# Altium PCB Mad17(grr).PcbDoc (part 1 of 3)
Units mil, origin at the board's own origin, x right, y up, seen from the top; angles counter-clockwise.
Board outline 5600 x 3900 mil, 2 copper layers (Top Layer, Bottom Layer); 72 components, 51 nets, 251 pads, 49 vias.
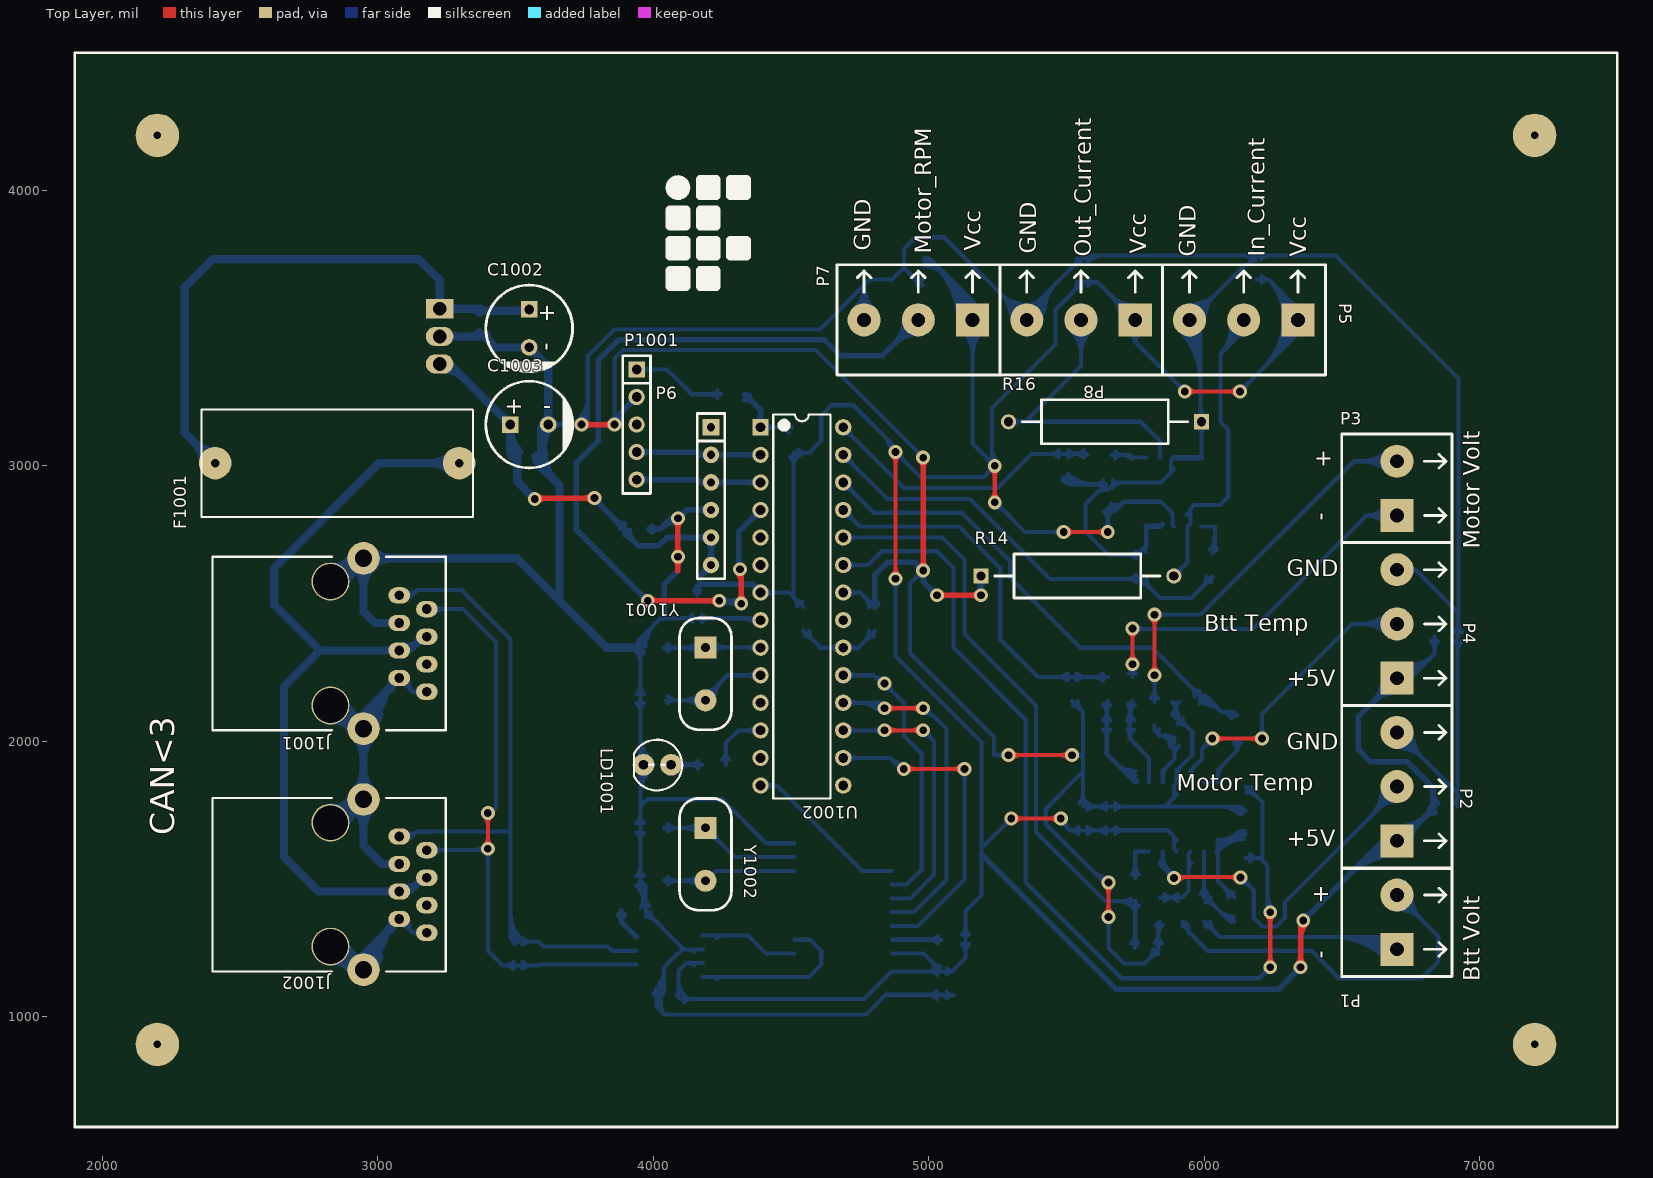
[diagram p0: Top Layer view]
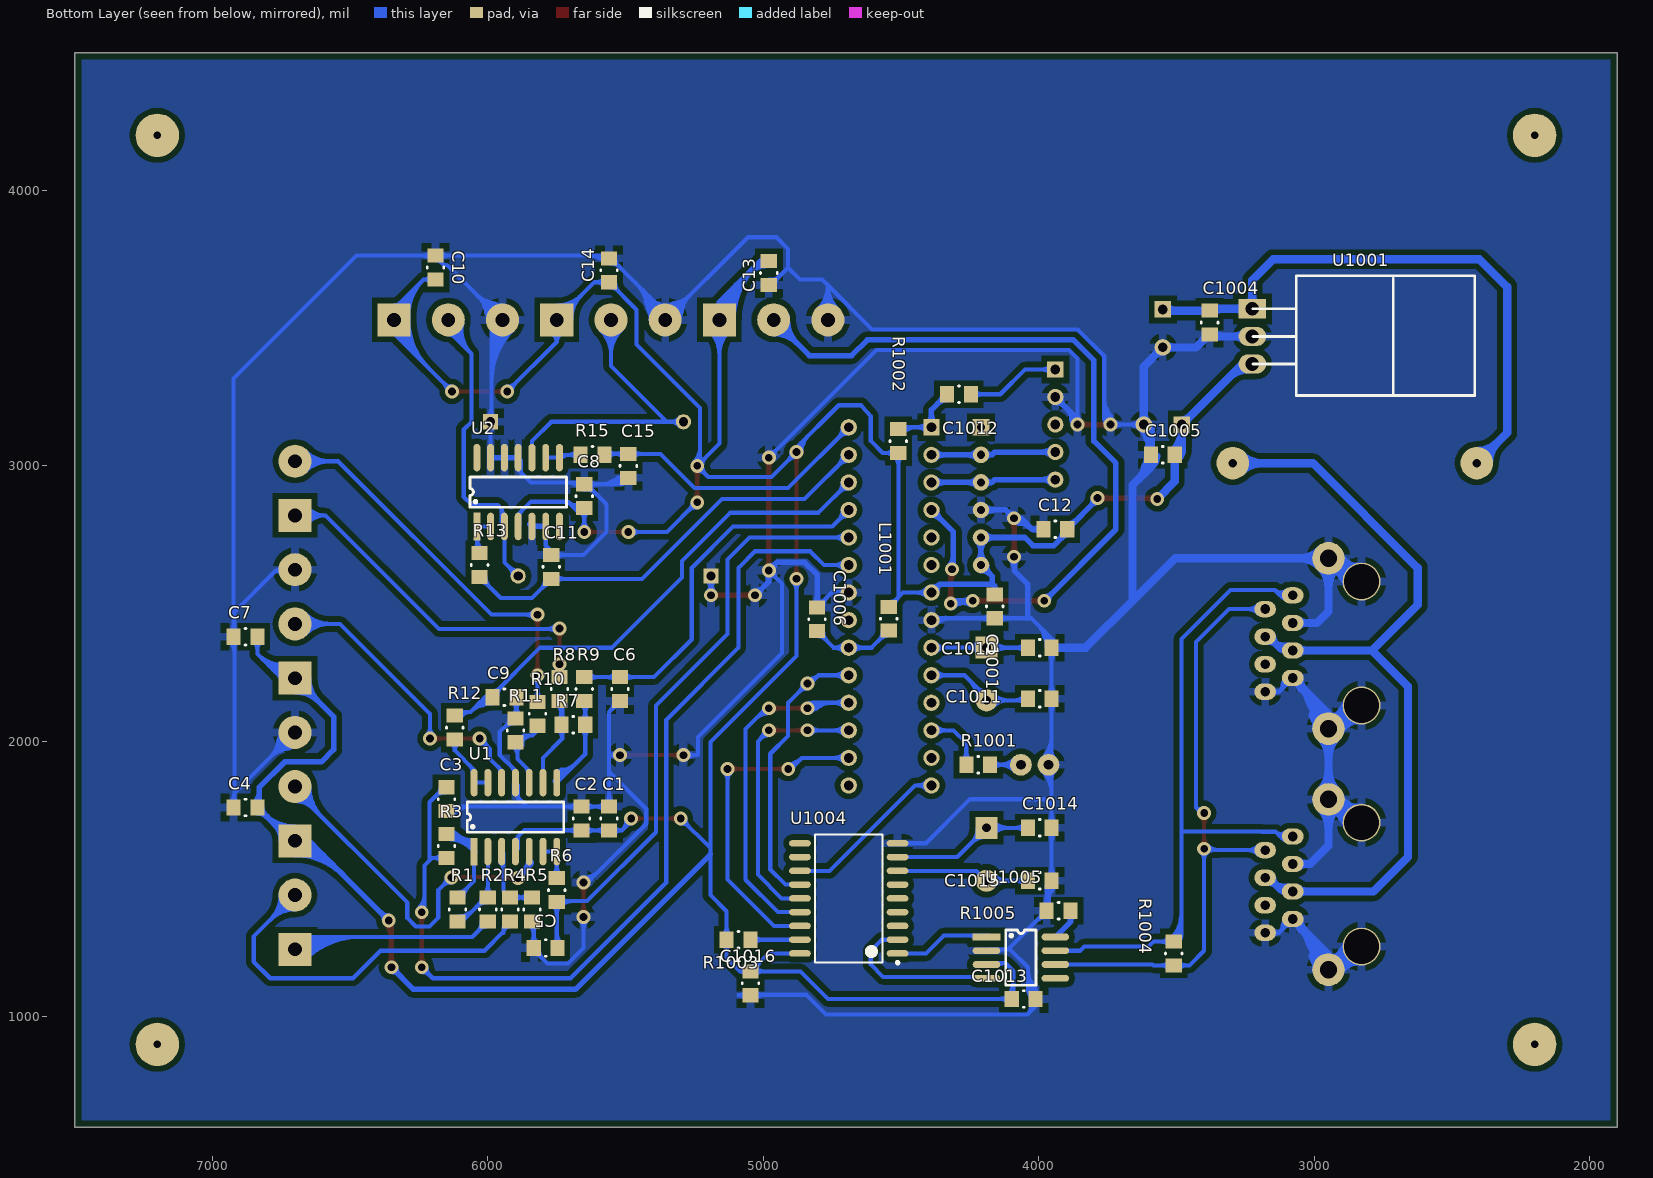
[diagram p1: Bottom Layer view, seen from below]
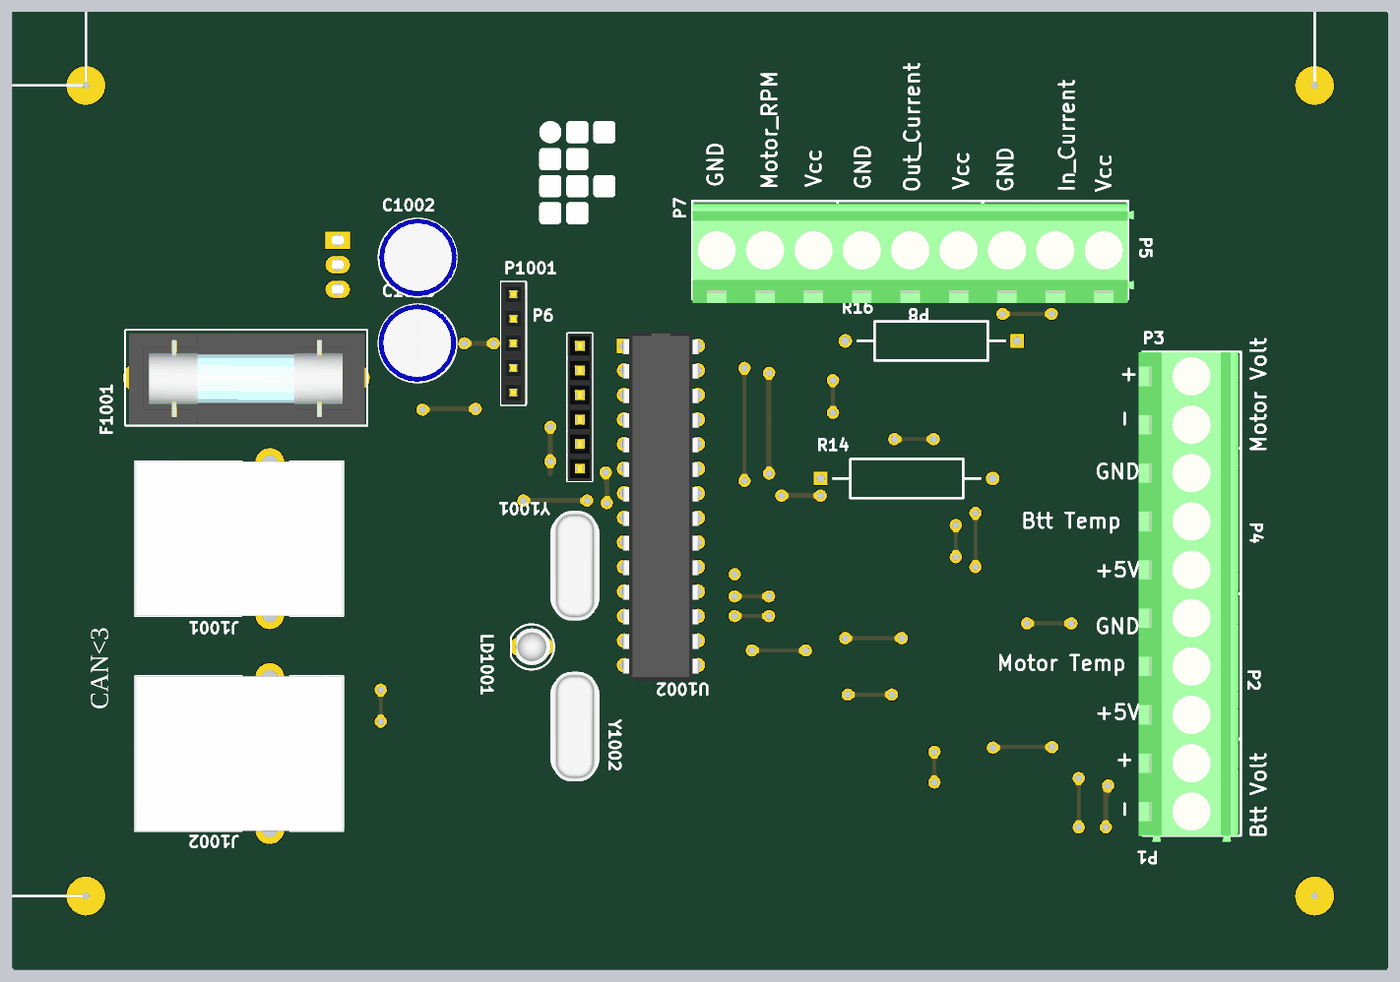
[diagram p4: 3D render of the assembled board from above, using the file's embedded part models]
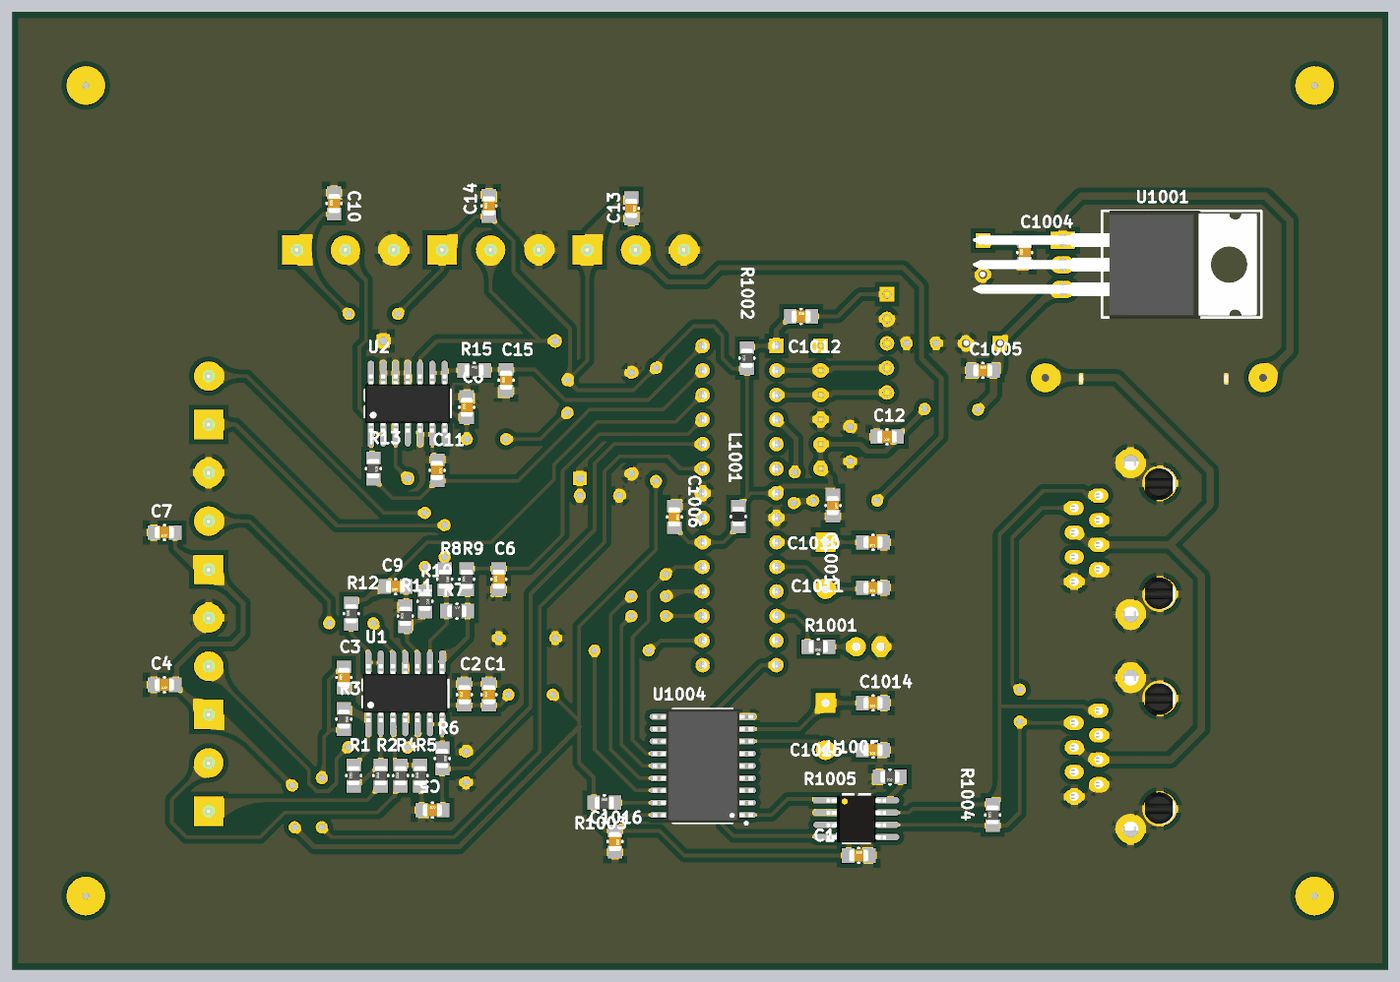
[diagram p5: 3D render of the assembled board from below, using the file's embedded part models]

## Layer stack, top to bottom
Top Layer: signal copper 1.4
Dielectric: dielectric 12.6, FR-4, Dk 4.8
Bottom Layer: signal copper 1.4

## Board outline
1900,600 1900,4500 7500,4500 7500,600

## Design rules (kind name [scope] priority, off if disabled: settings)
Clearance [All] p1: gap=20
PlaneClearance [All] p1: clearance=30
PlaneConnect [All] p1: planeconnectstyle=Relief reliefexpansion=20 reliefentries=4 reliefconductorwidth=30 reliefairgap=10
PolygonConnect [All] p1: connectstyle=Relief reliefconductorwidth=30 reliefentries=4 polygonreliefangle="90 Angle"
RoutingVias [All] p1: holewidth=28 width=50 viastyle="Through Hole" minholewidth=28 minwidth=50 maxholewidth=28 maxwidth=50
SilkscreenOverComponentPads SilkToSolderMaskClearance [IsPad] p1: minsilkscreentomaskgap=10
SolderMaskExpansion [All] p1: expansion=4
Width [All] p1: maxlimit=30 minlimit=15 preferedwidth=20
25 further rules are at their usual default settings.

## Classes and differential pairs
component class Sensores: C1 C2 C3 C4 C5 C6 C7 C8 C9 C10 C11 C12 C13 C14 C15 P1 P2 P3 P4 P5 P6 P7 P8 R1 R2 R3 R4 R5 R6 R7 R8 R9 R10 R11 R12 R13 R14 R15 R16 U1 U2
component class atmega: C1001 C1002 C1003 C1004 C1005 C1006 C1010 C1011 C1012 C1013 C1014 C1015 C1016 F1001 J1001 J1002 L1001 LD1001 P1001 R1001 R1002 R1003 R1004 R1005 U1001 U1002 U1004 U1005 Y1001 Y1002

## Components (designator, comment, footprint, x,y, rotation, side; value= is the part's Value field where it differs from the comment)
C1 "0805" 0805C 5560,1720 r270 bottom
C2 "0805" 0805C 5660,1720 r270 bottom
C3 "0805" 0805C 6150,1790 r270 bottom
C4 "0805" 0805C 6880,1760 r180 bottom
C5 "0805" 0805C 5790,1250 r0 bottom
C6 "0805" 0805C 5520,2190 r270 bottom
C7 "0805" 0805C 6880,2380 r180 bottom
C8 "0805" 0805C 5650,2890 r270 bottom
C9 "0805" 0805C 5940,2160 r180 bottom
C10 "0805" 0805C 6190,3720 r270 bottom
C11 "0805" 0805C 5770,2633.31 r90 bottom
C12 "0805" 0805C 3940,2770 r180 bottom
C13 "0805" 0805C 4980,3700 r90 bottom
C14 "0805" 0805C 5560,3710 r270 bottom
C15 "0805" 0805C 5490,3000 r270 bottom
C1001 "100nF" 0805C 4160,2490 r90 bottom
C1002 "CapacitorPol" CP3.5mm-8.0mm 3550,3567.8 r90 top
C1003 "CapacitorPol" CP3.5mm-8.0mm 3481.1,3150 r180 top
C1004 "100nF" 0805C 3380,3520 r270 bottom
C1005 "100nF" 0805C 3550,3040 r0 bottom
C1006 "100nF" 0805C 4805,2443.31 r90 bottom
C1010 "22pF" 0805C 3996.69,2340 r180 bottom
C1011 "22pF" 0805C 3996.69,2155 r180 bottom
C1012 "100nF" 0805C 4290,3260 r0 bottom
C1013 "100nF" 0805C 4055,1065 r0 bottom
C1014 "22pF" 0805C 3996.69,1686.06 r180 bottom
C1015 "22pF" 0805C 3996.69,1493.94 r180 bottom
C1016 "100nF" 0805C 5046.69,1121.69 r90 bottom
F1001 "250mA" "PORTA FUSIVEL" 2410,3010 r0 top
J1001 "RJ45 (canbus)" "ASSMANN A-2004-2-4-LP/FS" 2830,2355 r270 top
J1002 "RJ45 (canbus)" "ASSMANN A-2004-2-4-LP/FS" 2830,1480 r270 top
L1001 "?H" 0805L 4545,2445 r270 bottom
LD1001 "GREEN" LED3MM 4065,1915 r180 top
P1 "BatteryVoltage" KRE_2 6700,1245.2 r90 top
P2 "MotorTemperature" KRE_3 6700,1638.9 r90 top
P3 "MotorVoltage" KRE_2 6700,2820 r90 top
P4 "BatteryTemperature" KRE_3 6700,2229.45 r90 top
P5 "InputCurrent" KRE_3 6340.55,3530 r180 top
P6 "ZS-040 (HC-05)" "Header 6x1 8.5mm" 4210,3140 r270 top
P7 "MotorRPM" KRE_3 5159.45,3530 r180 top
P8 "OutputtCurrent" KRE_3 5750,3530 r180 top
P1001 "USART" HDR1X5 3940,3350 r270 top
R1 "Res1" 0805R 6110,1390 r270 bottom
R2 "Res1" 0805R 6000,1390 r270 bottom
R3 "Res1" 0805R 6150,1620 r90 bottom
R4 "Res1" 0805R 5920,1390 r270 bottom
R5 "Res1" 0805R 5840,1390 r270 bottom
R6 "Res1" 0805R 5750,1460 r90 bottom
R7 "Res1" 0805R 5690,2060 r0 bottom
R8 "Res1" 0805R 5740,2190 r90 bottom
R9 "Res1" 0805R 5650,2190 r270 bottom
R10 "Res1" 0805R 5820,2100 r90 bottom
R11 "Res1" 0805R 5900,2040 r270 bottom
R12 "Res1" 0805R 6120,2050 r270 bottom
R13 "Res1" 0805R 6030,2640 r90 bottom
R14 "0.5W" R700-4.0mm 5190,2600 r0 top
R15 "Res1" 0805R 5620,3040 r0 bottom
R16 "0.5W" R700-4.0mm 5990,3160 r180 top
R1001 "470" 0805R 4220,1915 r180 bottom
R1002 "10k" 0805R 4510,3090 r270 bottom
R1003 "10k" 0805R 5090,1280 r0 bottom
R1004 "120" 0805R 3510,1230 r270 bottom
R1005 "10k" 0805R 3928.31,1385 r180 bottom
U1 "LP324M" SOIC14-150(50) 6050,1600 r270 bottom
U2 "LP324M" SOIC14-150(50) 6040,2780 r270 bottom
U1001 "LM7805" TO220_DEITADO 3067.52,3470 r270 bottom
U1002 "ATmega328P" DIP28-300(100) 4390,3140 r270 top
U1004 "MCP2515-E/SO" WSO18_L 4690,1430 r0 bottom
U1005 "MCP2551-I/SN" SOIC08-150(50) 4190,1290 r90 bottom
X? "IFSC" IFSC_SILK 4090,4010 r0 top
Y1001 "16MHz" HC49-US-THT 4190,2245 r270 top
Y1002 "16MHz" HC49-US-THT 4190,1590 r270 top

## Footprints (in the part's own frame and the unit in brackets; to place one, negate y for a bottom-side part, rotate by r counter-clockwise, add the part's x,y. Pads: shape width x height; smd on the part's side, far side on the other; paste and mask are expansions set on the pad)
0805C [mm] "Chip Capacitor; Body 2 x 1.3 mm (LxW typ)"
  rect 1.3x1.5 smd: 1(1.1,0) 2(-1.1,0)
  silkscreen extent -0.05,-0.76 0.05,0.76, body extent -1,-0.62 1,0.64, height 0.78
0805L [mm] "Chip Inductor; Body 2 x 1.3 mm (LxW typ)"
  rect 1.3x1.5 smd: 1(1.1,0) 2(-1.1,0)
  silkscreen extent -0.05,-0.76 0.05,0.76, body extent -1,-0.59 1,0.61, height 0.95
0805R [mm] "Chip Resistor; Body 2 x 1.3 mm (LxW typ)"
  rect 1.3x1.5 smd: 1(1.1,0) 2(-1.1,0)
  silkscreen extent -0.05,-0.76 0.05,0.76, body extent -0.99,-0.63 1.01,0.63, height 0.8
"ASSMANN A-2004-2-4-LP/FS" [mm]
  oval 1.5x2 hole 0.9: 1(-4.445,6.31) 2(-3.175,8.85) 3(-1.905,6.31) 4(-0.635,8.85) 5(0.635,6.31) 6(1.905,8.85) 7(3.175,6.31) 8(4.445,8.85)
  round 3 hole 1.6: S(-7.855,3.01) S(7.845,3.01)
  round 3.5 hole 3.2: S(-5.715,-0.04) S(5.715,-0.04)
  silkscreen extent -8,-10.9 8,10.6, body extent -8,-10.9 8,10.6, height 13.6
CP3.5mm-8.0mm [mil] "Capacitor, Electrolytic, Radial; Body 8 x 10.5 mm (Dia.xH typ); Pin Spacing 3.5 mm (typ)"
  rect 60x60 hole 35: 1(0,0)
  round 60 hole 35: 2(-137.8,0)
  silkscreen extent -226,-157 89,157, body extent -226,-160 91,157, height 468
DIP28-300(100) [mm] "DIP, 28-Leads, Row Spacing 7.62mm, Pitch 2.54mm, Body 34.67x7.3mm"
  rect 1.5x1.5 hole 0.9: 1(0,0)
  round 1.5 hole 0.9: 2(2.54,0) 3(5.08,0) 4(7.62,0) 5(10.16,0) 6(12.7,0) 7(15.24,0) 8(17.78,0) 9(20.32,0) 10(22.86,0) 11(25.4,0) 12(27.94,0) 13(30.48,0) 14(33.02,0) 15(33.02,7.62) 16(30.48,7.62) 17(27.94,7.62) 18(25.4,7.62) 19(22.86,7.62) 20(20.32,7.62) 21(17.78,7.62) 22(15.24,7.62) 23(12.7,7.62) 24(10.16,7.62) 25(7.62,7.62) 26(5.08,7.62) 27(2.54,7.62) 28(0,7.62)
  silkscreen extent -1.19,1.16 34.21,6.46, body extent -1.4,-0.13 34.6,7.74, height 5.08
HC49-US-THT [mil] "THT Quartz Crystal"
  rect 80x80 hole 32: 1(-96.06,0)
  round 80 hole 32: 2(96.06,0)
  silkscreen extent -203,-94 203,94, body extent -223,-91 224,92, height 138
HDR1X5 [mm] "Connector; Header; 5 Position"
  rect 1.5x1.5 hole 0.9: 1(0,0)
  round 1.5 hole 0.9: 2(2.54,0) 3(5.08,0) 4(7.62,0) 5(10.16,0)
  silkscreen extent -1.27,-1.27 11.43,1.27, body extent -1.27,-1.27 11.43,1.23, height 8.4
"Header 6x1 8.5mm" [mil] "Stackable 6 pin header"
  rect 60x60 hole 30: 1(0,0)
  round 60 hole 30: 2(100,0) 3(200,0) 4(300,0) 5(400,0) 6(500,0)
  silkscreen extent -50,-50 550,50, body extent -50,-50 550,50, height 335
IFSC_SILK [mil]
  silkscreen extent -40,-360 250,40
KRE_2 [mil] "Terminal Block 2 pins"
  rect 120x120 hole 50: 1(0,0)
  round 120 hole 50: 2(196.85,0)
  silkscreen extent -98,-200 295,200, body extent -123,-190 294,216, height 559
KRE_3 [mil] "Terminal Block 3 pins"
  rect 120x120 hole 50: 1(0,0)
  round 120 hole 50: 2(196.85,0) 3(393.7,0)
  silkscreen extent -100,-200 492,200, body extent -123,-190 491,216, height 559
LED3MM [mm]
  round 2 hole 0.889: 1(0,0) 2(2.54,0)
  silkscreen extent -1.03,-2.31 3.43,2.36, body extent -0.63,-1.9 2.87,1.9, height 5.5
"PORTA FUSIVEL" [mm]
  round 3 hole 0.8: 1(0,0) 2(22.5,0)
  silkscreen extent -1.27,-4.95 23.77,4.95, body extent -0.9,-4.8 23.5,4.6, height 12.6
R700-4.0mm [mm] "Axial Device, Thru-Hole; 2 Leads; 0.7 in Pin Spacing"
  rect 1.4x1.4 hole 0.85: 1(0,0)
  round 1.4 hole 0.85: 2(17.78,0)
  silkscreen extent 1.27,-2.03 16.51,2.03
SOIC08-150(50) [mil] "SOIC; 8 Leads; Row Spacing 3.81 mm; Pitch 1.27 mm; 3D Antonio Fagaldo"
  rect 25x100 smd: 1(0,0)
  oval 25x100 smd: 2(-50,0) 3(-100,0) 4(-150,0) 5(-150,-250) 6(-100,-250) 7(-50,-250) 8(0,-250)
  silkscreen extent -175,-180 25,-70, body extent -173,-246 20,-4, height 69
SOIC14-150(50) [mil] "Plastic Small Outline 14 pinos"
  rect 100x25 smd: 1(0,0)
  oval 100x25 smd: 2(0,50) 3(0,100) 4(0,150) 5(0,200) 6(0,250) 7(0,300) 8(-250,300) 9(-250,250) 10(-250,200) 11(-250,150) 12(-250,100) 13(-250,50) 14(-250,0)
  silkscreen extent -180,-25 -70,325, body extent -243,-22 -7,322, height 69
TO220_DEITADO [mil]
  rect 70x100 hole 50: 1(-100,-157.48)
  oval 70x100 hole 50: 2(0,-157.48) 3(100,-157.48)
  silkscreen extent -220,-155 214,650, body extent -221,-522 220,632, height 185
WSO18_L [mm] "18-Pin Small Outline Integrated Circuit 1.27 mm Pitch, IPC High Density"
  oval 2x0.6 smd: 1(-4.5,5.08) 2(-4.5,3.81) 3(-4.5,2.54) 4(-4.5,1.27) 5(-4.5,0) 6(-4.5,-1.27) 7(-4.5,-2.54) 8(-4.5,-3.81) 9(-4.5,-5.08) 10(4.5,-5.08) 11(4.5,-3.81) 12(4.5,-2.54) 13(4.5,-1.27) 14(4.5,0) 15(4.5,1.27) 16(4.5,2.54) 17(4.5,3.81) 18(4.5,5.08)
  silkscreen extent -4.62,-5.9 3.1,6.05, body extent -5.21,-5.87 5.19,5.88, height 2.82

## Part data
C1 C2 C3 C4 C5 C6 C7 C8 C9 C10 C11 C12 C13 C14 C15: library part Cap, "Capacitor"
C1001 C1004 C1005 C1006 C1010 C1011 C1012 C1013 C1014 C1015 C1016: library part Cap_0805, "Capacitor"
C1002 C1003: "Solid Aluminum Capacitor with Organic Semiconductor Electrolyte: 100uF, 10V, Bulk Pack"
F1001: library part "Fuse 1", "Fuse"
J1001 J1002: library part "Modular Jack with Shield", "YH-59-01"
L1001: library part Ind_0805, "Inductor"
LD1001: library part LED_0805, "LED"
P1 P3: library part KRE_2, "Terminal Block 1x2"
P2 P4 P5 P7 P8: library part KRE_3, "Terminal Block 1x3"
P6: library part KRE_6, "Terminal Block 1x6"
P1001: library part "Header 5", "Header, 5-Pin"
R1 R2 R3 R4 R5 R6 R7 R8 R9 R10 R11 R12 R13 R15: "Resistor"
R14 R16: library part Res1, "Resistor"
R1001 R1002 R1003 R1004 R1005: library part Res_0805, "Resistor"
U1 U2: "Micropower Quad Operational Amplifier"
U1001: library part µA7805CKC, "Positive-Voltage Regulator"
U1002: "8-bit AVR Microcontroller, 32KB Flash, 1KB EEPROM, 2KB SRAM, 28-pin PDIP, Industrial Grade (-40°C to 85°C)"
U1004: library part CMP-0186-00035-2, "Stand-Alone CAN Controller With SPI Interface, 18-Pin SOIC, Extended Temperature"
U1005: library part CMP-1721-00003-1, "High-Speed CAN Transceiver, / 1 Mb/s, 4.5 to 5.5 V, 8-Pin SOIC (SN), Industrial Temperature, RoHS, Tube"
X?: "Logomarca IFSC"
Y1001 Y1002: library part Crystal, "Crystal"

## Free pads (board coordinates)
  round 157.48 hole 27.56: 0(2200,900) 0(2200,4200) 0(7200,900) 0(7200,4200)

## Via types
v1: diameter 50, hole 28, Top Layer to Bottom Layer, 49 vias

## Nets (pads, with @x,y where several pads share a name; then routed paths per layer and width w, separated by ;. In a path a pad name is that pad's centre, name@x,y a point inside that pad or via, vN(x,y) a via of type N, cw(c..) or ccw(c..) an arc to the next point about the centre after c; other vN are vias at no path point)
+5V: C1.1 C2.1 C4.1 C7.1 C8.1 C10.1 C12.1 C13.1 C14.1 C1001.1 C1003.1 C1005.2 C1013.1 C1016.1 L1001.2 P2.1 P4.1 P5.1 P6.5 P6.6 P7.1 P8.1 R1002.1 R1003.1 U1.4 U2.4 U1001.3 U1002.7 U1004.18 U1005.3 | length 27412.7
  Top Layer w15: v1(4880,2590) v1(4880,3050) ; v1(5240,2867.5) v1(5240,3000) ; v1(5300,1720) v1(5480,1720) v1@5490,1710 ; v1(5490,2760) v1(5650,2760) ; v1(5930,3270) v1(6130,3270) ; 4880,2632.25 cw(c4837.75,2632.25) 4867.63,2602.37 ccw(c4837.75,2632.25) 4880,2632.25 ; 4880,2632.25 ccw(c4922.25,2632.25) 4892.37,2602.37 cw(c4922.25,2632.25) 4880,2632.25 ; 4880,3007.75 cw(c4922.25,3007.75) 4892.37,3037.63 ccw(c4922.25,3007.75) 4880,3007.75 ; 4880,3007.75 ccw(c4837.75,3007.75) 4867.63,3037.63 cw(c4837.75,3007.75) 4880,3007.75 ; 5240,2909.75 cw(c5197.75,2909.75) 5227.63,2879.87 ccw(c5197.75,2909.75) 5240,2909.75 ; 5240,2909.75 ccw(c5282.25,2909.75) 5252.37,2879.87 cw(c5282.25,2909.75) 5240,2909.75 ; 5240,2957.75 cw(c5282.25,2957.75) 5252.37,2987.63 ccw(c5282.25,2957.75) 5240,2957.75 ; 5240,2957.75 ccw(c5197.75,2957.75) 5227.63,2987.63 cw(c5197.75,2957.75) 5240,2957.75 ; 5342.25,1720 cw(c5342.25,1762.25) 5312.37,1732.37 ccw(c5342.25,1762.25) 5342.25,1720 ; 5342.25,1720 ccw(c5342.25,1677.75) 5312.37,1707.63 cw(c5342.25,1677.75) 5342.25,1720 ; 5437.75,1720 cw(c5437.75,1677.75) 5467.63,1707.63 ccw(c5437.75,1677.75) 5437.75,1720 ; 5437.75,1720 ccw(c5437.75,1762.25) 5467.63,1732.37 cw(c5437.75,1762.25) 5437.75,1720 ; 5532.25,2760 cw(c5532.25,2802.25) 5502.37,2772.37 ccw(c5532.25,2802.25) 5532.25,2760 ; 5532.25,2760 ccw(c5532.25,2717.75) 5502.37,2747.63 cw(c5532.25,2717.75) 5532.25,2760 ; 5607.75,2760 cw(c5607.75,2717.75) 5637.63,2747.63 ccw(c5607.75,2717.75) 5607.75,2760 ; 5607.75,2760 ccw(c5607.75,2802.25) 5637.63,2772.37 cw(c5607.75,2802.25) 5607.75,2760 ; 5972.25,3270 cw(c5972.25,3312.25) 5942.37,3282.37 ccw(c5972.25,3312.25) 5972.25,3270 ; 5972.25,3270 ccw(c5972.25,3227.75) 5942.37,3257.63 cw(c5972.25,3227.75) 5972.25,3270 ; 6087.75,3270 cw(c6087.75,3227.75) 6117.63,3257.63 ccw(c6087.75,3227.75) 6087.75,3270 ; 6087.75,3270 ccw(c6087.75,3312.25) 6117.63,3282.37 cw(c6087.75,3312.25) 6087.75,3270
  Top Layer w20: v1(3570,2880) 3573.31,2883.31 v1(3786.69,2883.31) ; v1(6350,1180) 6350,1340 v1(6360,1350) ; v1@6351.49,1337.65 cw(c6341.83,1323.62) 6356.58,1315.1 ; 3750.48,2883.31 cw(c3750.48,2847.09) 3776.09,2872.7 ccw(c3750.48,2847.09) 3750.48,2883.31 ; 3750.48,2883.31 ccw(c3750.48,2919.52) 3776.09,2893.91 cw(c3750.48,2919.52) 3750.48,2883.31 ; 6350,1216.21 cw(c6313.79,1216.21) 6339.39,1190.61 ccw(c6313.79,1216.21) 6350,1216.21 ; 6350,1216.21 ccw(c6386.21,1216.21) 6360.61,1190.61 cw(c6386.21,1216.21) 6350,1216.21 ; v1@3580.61,2869.39 cw(c3614.2,2835.8) 3614.2,2883.31 ccw(c3614.2,2835.8) v1@3580.61,2869.39 ; v1@3580.61,2890.61 ccw(c3598.23,2908.23) 3598.23,2883.31 cw(c3598.23,2908.23) v1@3580.61,2890.61 ; 6350,1289.64 cw(c6420.36,1289.64) 6370.61,1339.39 ccw(c6420.36,1289.64) 6350,1289.64
  Bottom Layer w15: C1013.1@4092.5,1070.81 4092.5,1165.71 4121.79,1195 U1005.3@4180,1195 ; C1013.1@4098.31,1065 4765,1065 4865,1165 C1016.1@5046.69,1165 ; 4138.32,1192.61 ccw(c4142.97,1200.67) U1005.3@4149.17,1193.73 ; U1002.7@4390,2540 4493.31,2540 4510,2523.31 ; U1002.7@4405.58,2524.42 cw(c4443.18,2486.82) 4443.18,2540 cw(c4443.18,2593.18) U1002.7@4405.58,2555.58 ; 4516.9,2516.41 ccw(c4541.06,2540.57) L1001.2@4541.06,2506.4 ; L1001.2@4523,2489.3 ccw(c4478.46,2491.76) 4510,2523.31 ; L1001.2@4545,2488.31 4510,2523.31 ; 4852.56,3087.09 ccw(c4905.39,3101.25) v1@4881.11,3052.24 ; U1004.18@4867.17,1230 4981.69,1230 C1016.1@5046.69,1165 ; v1@4867.63,2577.63 cw(c4837.75,2547.75) 4880,2547.75 cw(c4922.25,2547.75) v1@4892.37,2577.63 ; v1(4880,2590) 4880,2310 5192.5,1997.5 5192.5,1612.5 ; v1(4880,3050) 4970,2960 5200,2960 v1(5240,3000) v1@5230,3010 ; v1@4885,3061.36 4726.36,3220 4645,3220 4640,3214.29 4610,3180 4610,3090 4566.69,3046.69 R1002.1@4510,3046.69 4510,2523.31 ; 5016.53,1195.37 ccw(c5054.12,1205.44) C1016.1@5043.59,1167.98 ; P7.1@5122.33,3492.88 cw(c5032.7,3403.25) 5159.45,3403.25 cw(c5286.19,3403.25) P7.1@5196.57,3492.88 ; P7.1@5132.93,3503.48 cw(c5068.92,3439.47) 5159.45,3439.47 cw(c5249.98,3439.47) P7.1@5185.97,3503.48 ; P7.1@5159.45,3530 5159.45,3080.55 v1@5230,3010 ; v1@5240,2850 cw(c5240,2801.72) 5274.14,2835.86 ; v1(5240,2867.5) 5240,2870 5350,2760 v1(5490,2760) ; v1@5240,2982.5 ccw(c5240,2940.25) 5210.13,2970.13 ccw(c5180.25,3000) 5222.5,3000 ccw(c5180.25,3000) 5210.13,3029.87 ccw(c5240,3059.75) v1@5240,3017.5 ; v1@5257.5,2867.5 ccw(c5293.71,2867.5) 5268.11,2841.89 ; v1@5282.5,1720 cw(c5240.25,1720) 5270.13,1690.13 cw(c5300,1660.25) v1@5300,1702.5 ; v1(5300,1720) 5192.5,1612.5 ; v1@5477.63,2747.63 ccw(c5447.75,2717.75) 5447.75,2760 ccw(c5447.75,2802.25) v1@5477.63,2772.37 ; v1@5490,1710 v1(5480,1720) 5470,1720 5513.31,1676.69 ; 5522.4,3629.09 ccw(c5484.79,3666.69) C14.1@5537.97,3666.69 ; 5531.9,3638.59 cw(c5556.06,3614.43) C14.1@5556.06,3648.6 ; v1(5650,2760) C8.1@5650,2846.69 5686.69,2846.69 ; P8.1@5697.5,3530 ccw(c5570.75,3530) 5660.38,3619.62 ccw(c5750,3709.25) P8.1@5750,3582.5 ; P8.1@5712.5,3530 ccw(c5621.97,3530) 5685.98,3594.02 ccw(c5750,3658.03) P8.1@5750,3567.5 ; U2.4@5890,2780 5885,2785 5885,2829.07 5844.07,2870 5710,2870 ; U1.4@5895.07,1638.31 ccw(c5877.19,1641.26) 5890,1654.07 ; U1.4@5900,1600 5890,1610 5890,1654.07 ; v1@5912.5,3270 ccw(c5870.25,3270) 5900.13,3299.87 ccw(c5930,3329.75) v1@5930,3287.5 ; v1(5930,3270) 5750,3450 ; v1(6130,3270) 6380,3520 6380,3530 6233.31,3676.69 ; v1@6130,3287.5 ccw(c6130,3329.75) 6159.87,3299.87 ccw(c6189.75,3270) v1@6147.5,3270 ; C10.1@6190,3676.69 6233.31,3676.69 ; 6215.96,3355.96 ccw(c6041.93,3530) P5.1@6288.05,3530 ; 6241.57,3381.57 ccw(c6093.14,3530) P5.1@6303.05,3530 ; 6257,3653 cw(c6145.07,3541.07) P5.1@6303.11,3532.12 ; 6267.18,3407.18 ccw(c6144.35,3530) P5.1@6318.05,3530 ; 6280.69,3629.31 cw(c6189.91,3538.53) P5.1@6318.09,3531.27 ; P5.1@6288.14,3532.97 ccw(c6100.23,3543.61) 6233.31,3676.69 ; 6292.78,3432.78 ccw(c6195.56,3530) P5.1@6333.05,3530 ; 6304.38,3605.62 cw(c6234.75,3535.99) P5.1@6333.06,3530.42 ; 6318.27,3591.73 ccw(c6340.55,3614.01) P5.1@6340.55,3582.5 ; 6318.39,3458.39 ccw(c6246.78,3530) P5.1@6348.05,3530 ; P4.1@6698.33,2222.14 ccw(c6713.05,2286.72) P4.1@6759.88,2239.88 ; P4.1@6699.72,2229.72 6749.72,2229.72 6836.69,2316.69 ; P4.1@6701.67,2236.76 ccw(c6720.17,2318) 6779.08,2259.08 ; P4.1@6705,2251.39 ccw(c6727.29,2349.28) 6798.28,2278.28 ; P4.1@6708.33,2266.01 ccw(c6734.42,2380.55) 6817.49,2297.49 ; P4.1@6711.66,2280.64 ccw(c6741.54,2411.83) 6836.69,2316.69 ; C7.1@6836.69,2380 6836.69,2316.69 ; 4141.98,1065 cw(c4141.98,1108.67) 4111.1,1077.79 ccw(c4141.98,1108.67) 4141.98,1065 ; 4141.98,1065 ccw(c4141.98,1021.33) 4111.1,1052.21 cw(c4141.98,1021.33) 4141.98,1065 ; 4510,3003.02 cw(c4553.67,3003.02) 4522.79,3033.9 ccw(c4553.67,3003.02) 4510,3003.02 ; 4510,3003.02 ccw(c4466.33,3003.02) 4497.21,3033.9 cw(c4466.33,3003.02) 4510,3003.02 ; 4557.61,3046.69 cw(c4557.61,3090.37) 4526.73,3059.48 ccw(c4557.61,3090.37) 4557.61,3046.69 ; 4557.61,3046.69 ccw(c4557.61,3003.02) 4526.73,3033.9 cw(c4557.61,3003.02) 4557.61,3046.69 ; 4909.87,3020.13 cw(c4939.75,3050) 4897.5,3050 ccw(c4939.75,3050) 4909.87,3020.13 ; 4909.87,3020.13 ccw(c4880,2990.25) 4880,3032.5 cw(c4880,2990.25) 4909.87,3020.13 ; 4999.08,1165 cw(c4999.08,1121.33) 5029.96,1152.21 ccw(c4999.08,1121.33) 4999.08,1165 ; 4999.08,1165 ccw(c4999.08,1208.67) 5029.96,1177.79 cw(c4999.08,1208.67) 4999.08,1165 ; C1016.1@5046.69,1165 5085,1165 ; 5085,1165 cw(c5085,1188.6) 5065.54,1175.24 ccw(c5085,1188.6) 5085,1165 ; 5085,1165 ccw(c5085,1141.4) 5065.54,1154.76 cw(c5085,1141.4) 5085,1165 ; 5085,1165 5133.31,1213.31 5133.31,1383.31 5192.5,1442.5 5192.5,1590 5192.5,1612.5 ; 5133.31,1232.39 cw(c5176.98,1232.39) 5146.1,1263.27 ccw(c5176.98,1232.39) 5133.31,1232.39 ; 5133.31,1232.39 ccw(c5089.63,1232.39) 5120.52,1263.27 cw(c5089.63,1232.39) 5133.31,1232.39 ; 5133.31,1327.61 cw(c5089.63,1327.61) 5120.52,1296.73 ccw(c5089.63,1327.61) 5133.31,1327.61 ; 5133.31,1327.61 ccw(c5176.98,1327.61) 5146.1,1296.73 cw(c5176.98,1327.61) 5133.31,1327.61 ; v1@5230,3010 5230,3210 5460,3440 5460,3566.69 C14.1@5560,3666.69 5613.31,3666.69 P8.1@5750,3530 5750,3450 ; 5513.31,1676.69 cw(c5551.84,1715.23) 5497.46,1718.84 ccw(c5551.84,1715.23) 5513.31,1676.69 ; 5513.31,1676.69 cw(c5513.31,1635.22) 5543.08,1664.1 ccw(c5513.31,1635.22) 5513.31,1676.69 ; 5513.31,1676.69 ccw(c5513.31,1718.17) 5543.08,1689.29 cw(c5513.31,1718.17) 5513.31,1676.69 ; 5513.31,1676.69 C1.1@5560,1676.69 C2.1@5660,1676.69 5660.81,1677.5 5866.57,1677.5 5890,1654.07 ; 5607.61,1676.69 cw(c5607.61,1720.37) 5576.73,1689.48 ccw(c5607.61,1720.37) 5607.61,1676.69 ; 5607.61,1676.69 ccw(c5607.61,1633.02) 5576.73,1663.9 cw(c5607.61,1633.02) 5607.61,1676.69 ; 5607.61,3666.69 cw(c5607.61,3710.37) 5576.73,3679.48 ccw(c5607.61,3710.37) 5607.61,3666.69 ; 5607.61,3666.69 ccw(c5607.61,3623.02) 5576.73,3653.9 cw(c5607.61,3623.02) 5607.61,3666.69 ; 5612.39,1676.69 cw(c5612.39,1633.02) 5643.27,1663.9 ccw(c5612.39,1633.02) 5612.39,1676.69 ; 5612.39,1676.69 ccw(c5612.39,1720.37) 5643.27,1689.48 cw(c5612.39,1720.37) 5612.39,1676.69 ; 5650,2802.25 cw(c5607.75,2802.25) 5637.63,2772.37 ccw(c5607.75,2802.25) 5650,2802.25 ; 5650,2802.25 ccw(c5692.25,2802.25) 5662.37,2772.37 cw(c5692.25,2802.25) 5650,2802.25 ; 5650,2803.02 cw(c5693.67,2803.02) 5662.79,2833.9 ccw(c5693.67,2803.02) 5650,2803.02 ; 5650,2803.02 ccw(c5606.33,2803.02) 5637.21,2833.9 cw(c5606.33,2803.02) 5650,2803.02 ; 5686.69,2846.69 cw(c5686.69,2867.3) 5669.25,2856.33 ccw(c5686.69,2867.3) 5686.69,2846.69 ; 5686.69,2846.69 ccw(c5686.69,2826.09) 5669.25,2837.06 cw(c5686.69,2826.09) 5686.69,2846.69 ; 5686.69,2846.69 5710,2870 ; 5710,2870 cw(c5681.21,2898.79) 5662.33,2862.72 ccw(c5681.21,2898.79) 5710,2870 ; 5750,3450 cw(c5784.7,3450) 5770.89,3481.84 ccw(c5784.7,3450) 5750,3450 ; 5750,3450 ccw(c5715.3,3450) 5729.11,3481.84 cw(c5715.3,3450) 5750,3450 ; 5890,1654.07 ccw(c5901.65,1654.07) 5900.5,1642.48 cw(c5901.65,1654.07) 5890,1654.07 ; 6233.3,3676.69 cw(c6233.3,3710.48) 6207.66,3688.48 ccw(c6233.3,3710.48) 6233.3,3676.69 ; 6233.3,3676.69 ccw(c6233.3,3642.9) 6207.66,3664.91 cw(c6233.3,3642.9) 6233.3,3676.69 ; 6836.69,2332.39 cw(c6880.37,2332.39) 6849.48,2363.27 ccw(c6880.37,2332.39) 6836.69,2332.39 ; 6836.69,2332.39 ccw(c6793.02,2332.39) 6823.9,2363.27 cw(c6793.02,2332.39) 6836.69,2332.39 ; C1013.1@4085.52,1081.73 ccw(c4068.65,1098.59) 4092.5,1098.59 cw(c4068.65,1098.59) C1013.1@4085.52,1081.73 ; 4092.5,1126.63 ccw(c4156,1126.63) 4111.1,1081.73 cw(c4156,1126.63) 4092.5,1126.63 ; 4128.36,1195 cw(c4128.36,1165.86) 4148.96,1186.46 ccw(c4128.36,1165.86) 4128.36,1195 ; 4838.56,3107.8 cw(c4780.75,3050) 4862.5,3050 ccw(c4780.75,3050) 4838.56,3107.8 ; 4864.16,3082.2 cw(c4831.97,3050) 4877.5,3050 ccw(c4831.97,3050) 4864.16,3082.2 ; 5009.09,1202.6 cw(c4971.49,1165) 5024.67,1165 ccw(c4971.49,1165) 5009.09,1202.6 ; 5018.59,1193.1 ccw(c5042.76,1217.26) 5042.76,1183.09 cw(c5042.76,1217.26) 5018.59,1193.1 ; 5230,3030.18 ccw(c5270.18,3030.18) 5241.77,3001.77 cw(c5270.18,3030.18) 5230,3030.18 ; 5230,3066.39 ccw(c5306.39,3066.39) 5252.37,3012.37 cw(c5306.39,3066.39) 5230,3066.39 ; v1@5480,1702.5 cw(c5480,1684.39) 5492.8,1697.2 ccw(c5480,1684.39) v1@5480,1702.5 ; C8.1@5648.41,2836.14 ccw(c5661.38,2860.9) 5681.14,2841.14 cw(c5661.38,2860.9) C8.1@5648.41,2836.14 ; C8.1@5655.37,2849.43 ccw(c5671.29,2879.84) 5695.57,2855.57 cw(c5671.29,2879.84) C8.1@5655.37,2849.43 ; C2.1@5676.73,1663.9 cw(c5709.56,1631.07) 5709.56,1677.5 ccw(c5709.56,1631.07) C2.1@5676.73,1663.9 ; C2.1@5676.73,1689.48 ccw(c5705.66,1718.42) 5705.66,1677.5 cw(c5705.66,1718.42) C2.1@5676.73,1689.48 ; 5876.82,2837.25 cw(c5857.07,2817.5) 5885,2817.5 ccw(c5857.07,2817.5) 5876.82,2837.25 ; 5886.82,1657.25 cw(c5867.07,1637.5) 5895,1637.5 ccw(c5867.07,1637.5) 5886.82,1657.25
  Bottom Layer w20: v1@3783.39,2883.31 v1(3786.69,2883.31) ; v1@3785.04,2881.65 C12.1@3896.69,2770 3896.69,2759.07 3945.29,2710.47 4021.32,2710.47 4050.85,2740 P6.5@4210,2740 P6.6@4210,2640 4170,2600 4170,2573.31 4166.69,2570 ; v1@3786.69,2868.31 cw(c3786.69,2840.08) 3806.65,2860.04 ; v1@3801.69,2883.31 ccw(c3845.89,2883.31) 3814.64,2852.05 ; 3863.36,2803.34 ccw(c3896.69,2836.67) C12.1@3896.69,2789.53 ; C12.1@3872.86,2793.83 cw(c3852.97,2773.94) C12.1@3881.1,2773.94 ; C12.1@3896.69,2750.47 cw(c3896.69,2729.72) C12.1@3911.37,2744.39 ; C12.1@3912.28,2766.06 ccw(c3966.81,2766.06) 3928.25,2727.51 ; C1001.1@4160,2533.31 4160,2563.31 ; P6.6@4190,2640 cw(c4141.72,2640) 4175.86,2605.86 cw(c4210,2571.72) P6.6@4210,2620 ; P6.6@4195.86,2654.14 ccw(c4161.72,2688.28) 4210,2688.28 ccw(c4258.28,2688.28) P6.6@4224.14,2654.14 ; P6.5@4195.86,2754.14 cw(c4161.72,2788.28) 4161.72,2740 cw(c4161.72,2691.72) 4195.86,2725.86 cw(c4161.72,2691.72) 4210,2691.72 cw(c4258.28,2691.72) P6.5@4224.14,2725.86 ; U1002.7@4370.52,2541.39 ccw(c4333.54,2544.03) 4360,2570 ; U1002.7@4370.54,2541.62 ccw(c4335.05,2544.59) 4360,2570 ; U1002.7@4388.38,2559.46 cw(c4385.41,2594.95) 4360,2570 ; U1002.7@4388.61,2559.48 cw(c4385.97,2596.46) 4360,2570 ; U1002.7@4390,2540 4360,2570 ; v1(4880,3050) 4885,3055 v1@4885,3061.36 ; C13.1@4983.94,3727.72 cw(c4983.94,3624.91) 5056.63,3697.61 ; C13.1@4983.94,3747.72 cw(c4983.94,3693.19) 5022.49,3731.75 ; C13.1@4990,3753.31 5000,3743.31 5010.93,3743.31 ; 5028.28,3725.96 cw(c4832.32,3530) P7.1@5109.45,3530 ; 5062.42,3691.81 cw(c4900.61,3530) P7.1@5129.45,3530 ; 5096.57,3657.67 cw(c4968.89,3530) P7.1@5149.45,3530 ; 5130.71,3623.53 cw(c5037.18,3530) P7.1@5169.45,3530 ; P7.1@5159.45,3530 5159.45,3594.79 ; 5192.5,1590 5682.5,1100 6270,1100 v1(6350,1180) ; v1@6335,1180 cw(c6298.79,1180) 6324.39,1154.39 cw(c6350,1128.79) v1@6350,1165 ; v1(6360,1350) 6640,1630 P2.1@6700,1630 ; v1@6360,1365 ccw(c6360,1401.21) 6385.61,1375.61 ccw(c6411.21,1350) v1@6375,1350 ; 6527.41,1517.41 cw(c6700,1344.81) P2.1@6700,1588.9 ; 6561.55,1551.55 cw(c6700,1413.1) P2.1@6700,1608.9 ; 6595.69,1585.69 cw(c6700,1481.38) P2.1@6700,1628.9 ; 6613.7,2143.7 cw(c6700,2057.41) P4.1@6700,2179.45 ; 6615.03,2145.03 ccw(c6530.62,2229.45) P4.1@6650,2229.45 ; 6629.83,1619.83 cw(c6700,1549.67) P2.1@6700,1648.9 ; P4.1@6647.85,2177.85 cw(c6700,2125.69) P4.1@6700,2199.45 ; P4.1@6649.18,2179.18 ccw(c6598.9,2229.45) P4.1@6670,2229.45 ; P4.1@6699.72,2229.72 6560,2090 6560,1970 6604.25,1925.75 6737.28,1925.75 6830,1833.03 6830,1766.69 C4.1@6836.69,1760 6715.59,1638.9 P2.1@6700,1638.9 ; P2.1@6700,1668.9 ccw(c6700,1778.96) 6777.83,1701.13 ; P2.1@6700,1688.9 ccw(c6700,1847.25) C4.1@6811.97,1735.28 ; P2.1@6750,1638.9 cw(c6833.07,1638.9) 6774.33,1697.64 ; 6800.38,1727.5 ccw(c6772.78,1768.66) C4.1@6821.4,1759.08 ; 6803.36,1726.66 cw(c6836.69,1693.33) C4.1@6836.69,1740.47 ; C4.1@6812.86,1736.17 ccw(c6792.97,1756.06) C4.1@6821.1,1756.06 ; C4.1@6814.38,1736.89 cw(c6828.71,1715.53) C4.1@6833.68,1740.77 ; 4160,2563.31 cw(c4138.93,2563.31) 4151.04,2546.07 ccw(c4138.93,2563.31) 4160,2563.31 ; 4160,2563.31 ccw(c4181.07,2563.31) 4168.96,2546.07 cw(c4181.07,2563.31) 4160,2563.31 ; 4160,2563.31 4166.69,2570 ; 4166.69,2570 4360,2570 ; 4360,2570 cw(c4334.32,2544.32) 4370.53,2541.51 ccw(c4334.32,2544.32) 4360,2570 ; 4360,2570 ccw(c4385.68,2595.68) 4388.49,2559.47 cw(c4385.68,2595.68) 4360,2570 ; 5010.93,3743.31 cw(c5010.93,3758.88) 4997.44,3751.1 ccw(c5010.93,3758.88) 5010.93,3743.31 ; 5010.93,3743.31 ccw(c5010.93,3727.74) 4997.44,3735.52 cw(c5010.93,3727.74) 5010.93,3743.31 ; 5010.93,3743.31 5159.45,3594.79 ; 5159.45,3594.79 cw(c5142.48,3594.79) 5146.78,3578.37 ccw(c5142.48,3594.79) 5159.45,3594.79 ; 5159.45,3594.79 ccw(c5176.42,3594.79) 5172.12,3578.37 cw(c5176.42,3594.79) 5159.45,3594.79 ; 6830,1817.73 ccw(c6890.49,1817.73) 6847.72,1774.96 cw(c6890.49,1817.73) 6830,1817.73
  Bottom Layer w30: U1001.3@3230,3370 3261.1,3370 C1003.1@3481.1,3150 3481.1,3065.59 C1005.2@3506.69,3040 3506.69,2943.31 v1(3570,2880) ; U1001.3@3240,3350 cw(c3240,3250.77) 3310.17,3320.94 ; C1003.1@3466.1,3150 ccw(c3429.89,3150) 3455.5,3175.61 ccw(c3481.1,3201.21) C1003.1@3481.1,3165 ; C1005.2@3481.1,3058.86 ccw(c3521.62,3058.86) C1005.2@3492.97,3030.21 ; C1003.1@3481.1,3131.29 ccw(c3594.04,3131.29) C1005.2@3514.18,3051.43 ; 3481.1,3113.79 cw(c3517.32,3113.79) 3491.71,3139.39 ccw(c3517.32,3113.79) 3481.1,3113.79 ; 3481.1,3113.79 ccw(c3444.89,3113.79) 3470.5,3139.39 cw(c3444.89,3113.79) 3481.1,3113.79
+5V_ADC: C1006.2 L1001.1 U1002.20 | length 614.7
  Bottom Layer w15: L1001.1@4545,2401.69 4606.69,2340 U1002.20@4690,2340 4745,2340 C1006.2@4805,2400 ; L1001.1@4548.94,2383.6 cw(c4548.94,2349.43) 4573.1,2373.59 ; L1001.1@4567.03,2401.69 ccw(c4620.21,2401.69) 4582.6,2364.09 ; U1002.20@4674.42,2324.42 ccw(c4636.82,2286.82) 4636.82,2340 ccw(c4636.82,2393.18) U1002.20@4674.42,2355.58 ; U1002.20@4705.58,2324.42 cw(c4743.18,2286.82) 4743.18,2340 cw(c4743.18,2393.18) U1002.20@4705.58,2355.58 ; 4767.4,2362.4 ccw(c4729.79,2400) C1006.2@4782.97,2400 ; 4776.9,2371.9 cw(c4801.06,2347.74) C1006.2@4801.06,2381.91
+18V: C1002.1 C1004.2 F1001.1 U1001.1 | length 2745.1
  Bottom Layer w30: F1001.1@2365.94,3010 ccw(c2259.59,3010) 2334.79,3085.21 ccw(c2410,3160.41) F1001.1@2410,3054.06 ; F1001.1@2410,3010 2300,3120 2300,3650 2400,3750 3150,3750 3225,3675 U1001.1@3225,3570 3373.31,3570 C1004.2@3380,3563.31 3545.51,3563.31 C1002.1@3550,3567.8 ; 3225,3618.28 cw(c3176.72,3618.28) 3210.86,3584.14 ccw(c3176.72,3618.28) 3225,3618.28 ; 3225,3618.28 ccw(c3273.28,3618.28) 3239.14,3584.14 cw(c3273.28,3618.28) 3225,3618.28 ; 3288.28,3570 cw(c3288.28,3618.28) 3254.14,3584.14 ccw(c3288.28,3618.28) 3288.28,3570 ; 3288.28,3570 ccw(c3288.28,3521.72) 3254.14,3555.86 cw(c3288.28,3521.72) 3288.28,3570 ; 3334.34,3570 cw(c3334.34,3521.58) 3368.57,3555.82 ccw(c3334.34,3521.58) 3334.34,3570 ; 3502.95,3563.31 ccw(c3502.95,3614.84) 3539.39,3578.4 cw(c3502.95,3614.84) 3502.95,3563.31
+18V_PRE: F1001.2 J1001.4 J1001.5 J1002.4 J1002.5 | length 4487.1
  Bottom Layer w15: J1002.5@3078.43,1455 3123.79,1455 ; J1001.5@3078.43,2330 3123.79,2330 ; J1002.5@3087.24,1447.09 ccw(c3093.93,1498.62) 3130.67,1461.88 ; J1001.5@3087.24,2322.09 ccw(c3093.93,2373.62) 3130.67,2336.88 ; J1002.5@3089.17,1461.97 ccw(c3098.88,1536.79) J1002.4@3152.23,1483.44 ; J1001.5@3089.17,2336.97 ccw(c3098.88,2411.79) J1001.4@3152.23,2358.44 ; J1002.5@3091.1,1476.84 ccw(c3103.84,1574.95) J1002.4@3173.79,1505 ; J1001.5@3091.1,2351.84 ccw(c3103.84,2449.95) J1001.4@3173.79,2380 ; J1002.5@3113.16,1460.88 ccw(c3078.33,1521.23) J1002.4@3146.9,1508.9 ; J1001.5@3113.16,2335.88 ccw(c3078.33,2396.23) J1001.4@3146.9,2383.9 ; 3127.3,1458.5 ccw(c3080.8,1505) J1002.4@3146.56,1505 ; 3127.3,2333.5 ccw(c3080.8,2380) J1001.4@3146.56,2380 ; 3128.14,1478.64 ccw(c3109.41,1511.08) J1002.4@3146.67,1507.25 ; 3128.14,2353.64 ccw(c3109.41,2386.08) J1001.4@3146.67,2382.25 ; 3129.28,1479.3 cw(c3151.42,1440.95) 3162.88,1483.72 ccw(c3158.39,1466.97) 3149.72,1481.99 ; 3129.28,2354.3 cw(c3151.42,2315.95) 3162.88,2358.72 ccw(c3158.39,2341.97) 3149.72,2356.99 ; 3139.87,1471.08 cw(c3168.58,1442.37) J1002.4@3168.58,1482.97 ; 3139.87,2346.08 cw(c3168.58,2317.37) J1001.4@3168.58,2357.97 ; 3141.14,1477.04 ccw(c3119.95,1513.74) J1002.4@3161.67,1506.24 ; 3141.14,2352.04 ccw(c3119.95,2388.74) J1001.4@3161.67,2381.24 ; J1002.4@3178.43,1505 J1002.4@3173.79,1505 ; J1001.4@3178.43,2380 J1001.4@3173.79,2380 ; 3123.79,1455 cw(c3123.79,1472.63) 3108,1464.79 ccw(c3123.79,1472.63) 3123.79,1455 ; 3123.79,1455 ccw(c3123.79,1437.37) 3108,1445.21 cw(c3123.79,1437.37) 3123.79,1455 ; 3123.79,1455 J1002.4@3173.79,1505 ; 3123.79,2330 cw(c3123.79,2347.63) 3108,2339.79 ccw(c3123.79,2347.63) 3123.79,2330 ; 3123.79,2330 ccw(c3123.79,2312.37) 3108,2320.21 cw(c3123.79,2312.37) 3123.79,2330 ; 3123.79,2330 J1001.4@3173.79,2380
  Bottom Layer w30: J1002.5@3078.43,1455 2785,1455 2660,1580 2660,2200 2790,2330 ; J1001.5@3078.43,2330 2790,2330 ; F1001.2@3264.68,2978.85 ccw(c3189.47,2903.64) 3189.47,3010 ccw(c3189.47,3116.36) F1001.2@3264.68,3041.15 ; F1001.2@3295,3010 3005,3010 2625,2630 2625,2495 2790,2330 ; 3033.51,1455 cw(c3033.51,1419.93) 3058.31,1444.73 ccw(c3033.51,1419.93) 3033.51,1455 ; 3033.51,1455 ccw(c3033.51,1490.07) 3058.31,1465.27 cw(c3033.51,1490.07) 3033.51,1455 ; 3033.51,2330 cw(c3033.51,2294.93) 3058.31,2319.73 ccw(c3033.51,2294.93) 3033.51,2330 ; 3033.51,2330 ccw(c3033.51,2365.07) 3058.31,2340.27 cw(c3033.51,2365.07) 3033.51,2330
BATTERYTEMPERATURE: C9.2 R12.2 U1002.26 | length 2740.9
  Bottom Layer w15: U1002.26@4690,2940 4800,2830 5120,2830 5295,2655 5295,2595 5550,2340 5810.7,2340 5983.31,2167.39 C9.2@5983.31,2160 6010,2160 ; 5949.98,2200.72 cw(c5913.19,2163.94) C9.2@5965.22,2163.94 ; 5958.33,2192.37 ccw(c5983.31,2217.35) C9.2@5983.31,2182.03 ; C9.2@5985.92,2157.71 ccw(c6042.72,2193.47) 6027.85,2128.02 ; C9.2@5992.94,2140.75 cw(c6010.78,2112.42) 6018.21,2145.07 ; C9.2@5999.37,2164.39 ccw(c6036.08,2183.41) 6026.92,2143.09 ; R12.2@6120,2093.31 6106.28,2107.03 6062.97,2107.03 ; 4727.6,2902.4 cw(c4765.21,2940) 4712.03,2940 ccw(c4765.21,2940) 4727.6,2902.4 ; 4727.6,2902.4 ccw(c4690,2864.79) 4690,2917.97 cw(c4690,2864.79) 4727.6,2902.4 ; 6010,2160 cw(c6010,2170.65) 6000.11,2166.7 ccw(c6010,2170.65) 6010,2160 ; 6010,2160 ccw(c6010,2149.35) 6000.11,2153.3 cw(c6010,2149.35) 6010,2160 ; 6010,2160 6062.97,2107.03 ; 6062.97,2107.03 ccw(c5988.05,2032.11) 5984,2137.99 cw(c5988.05,2032.11) 6062.97,2107.03 ; 6062.97,2107.03 cw(c6062.97,2064.91) 6100.11,2084.78 ccw(c6062.97,2064.91) 6062.97,2107.03 ; C9.2@5982.85,2167.96 cw(c5984.47,2125.66) 6014.4,2155.6 ccw(c5984.47,2125.66) C9.2@5982.85,2167.96 ; C9.2@5983.43,2152.97 cw(c5986.26,2078.89) 6038.69,2131.31 ccw(c5986.26,2078.89) C9.2@5983.43,2152.97 ; 6088.01,2107.03 cw(c6088.01,2078.3) 6113.34,2091.85 ccw(c6088.01,2078.3) 6088.01,2107.03
BATTERYVOLTAGE: C3.2 R3.2 U1002.23 | length 4193.4
  Top Layer w15: v1(6240,1180) v1(6240,1380) ; 6240,1222.25 cw(c6197.75,1222.25) 6227.63,1192.37 ccw(c6197.75,1222.25) 6240,1222.25 ; 6240,1222.25 ccw(c6282.25,1222.25) 6252.37,1192.37 cw(c6282.25,1222.25) 6240,1222.25 ; 6240,1337.75 cw(c6282.25,1337.75) 6252.37,1367.63 ccw(c6282.25,1337.75) 6240,1337.75 ; 6240,1337.75 ccw(c6197.75,1337.75) 6227.63,1367.63 cw(c6197.75,1337.75) 6240,1337.75
  Bottom Layer w15: U1002.23@4690,2640 4780,2640 4830,2690 5030,2690 5090,2630 5090,2340 5352.5,2077.5 5352.5,1487.5 5700,1140 6200,1140 v1(6240,1180) ; U1002.23@4705.58,2624.42 cw(c4743.18,2586.82) 4743.18,2640 cw(c4743.18,2693.18) U1002.23@4705.58,2655.58 ; R3.2@6150,1576.69 6203.31,1576.69 6230,1550 v1@6230,1400 ; C3.2@6150,1833.31 6157.39,1833.31 6211.65,1779.05 6211.65,1568.35 ; C3.2@6153.94,1815.22 cw(c6153.94,1763.19) 6190.72,1799.98 ; C3.2@6172.03,1833.31 ccw(c6207.35,1833.31) 6182.37,1808.33 ; v1@6222.5,1180 cw(c6180.25,1180) 6210.13,1150.13 cw(c6240,1120.25) v1@6240,1162.5 ; 6230,1410.18 ccw(c6270.18,1410.18) v1@6241.77,1381.77 ; 6230,1446.39 ccw(c6306.39,1446.39) v1@6252.37,1392.37 ; 6197.61,1576.69 cw(c6197.61,1620.37) 6166.73,1589.48 ccw(c6197.61,1620.37) 6197.61,1576.69 ; 6197.61,1576.69 ccw(c6197.61,1533.02) 6166.73,1563.9 cw(c6197.61,1533.02) 6197.61,1576.69